# Altium PCB Copy of CCP_PCB2.PcbDoc
Units mil, origin at the board's own origin, x right, y up, seen from the top; angles counter-clockwise.
Board outline 4480 x 3340 mil, 2 copper layers (Top Layer, Bottom Layer); 67 components, 54 nets, 268 pads, 26 vias.
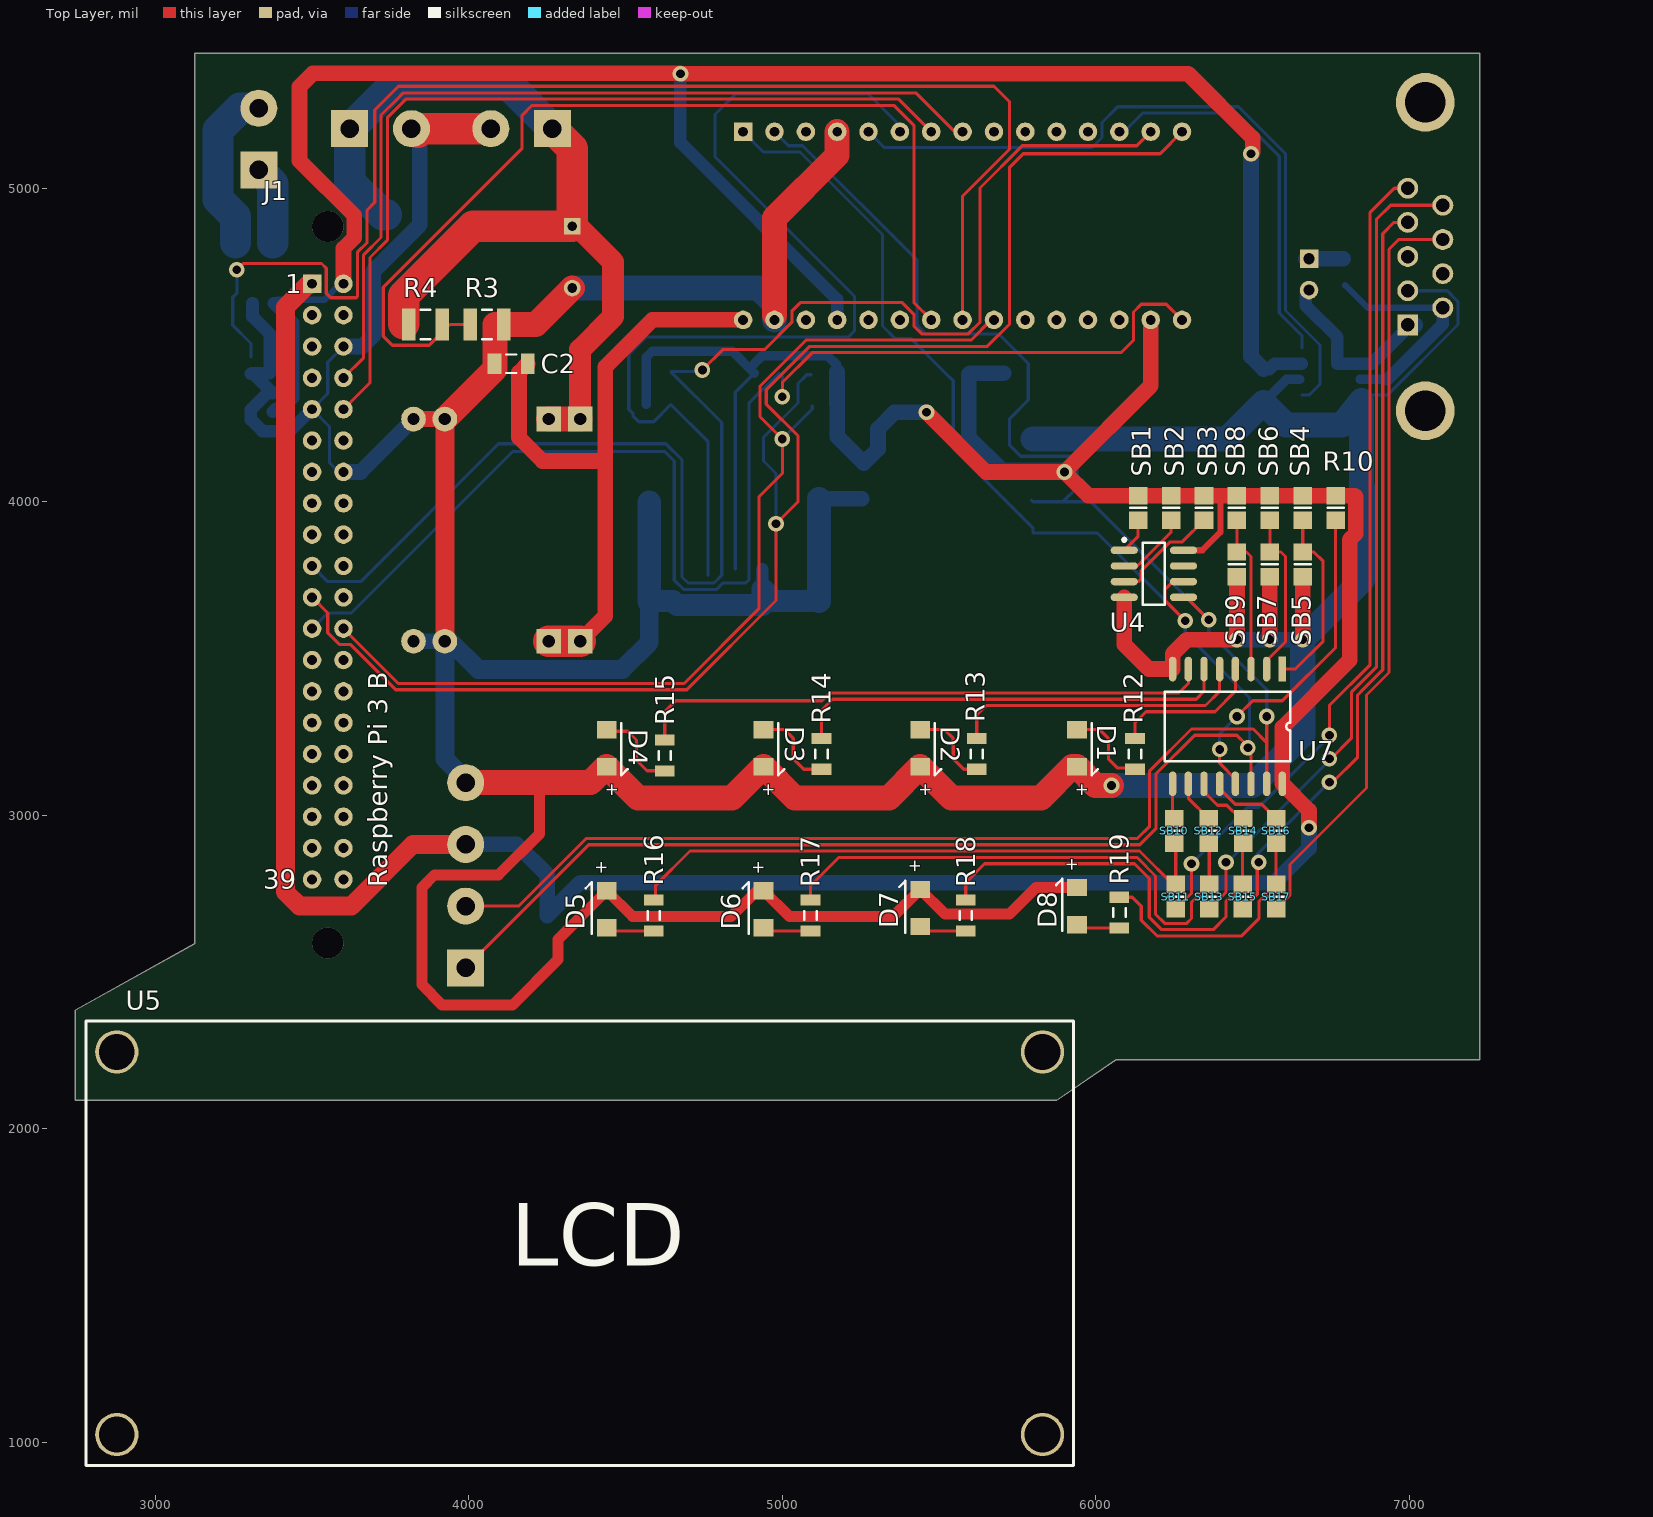
[diagram p0: Top Layer view]
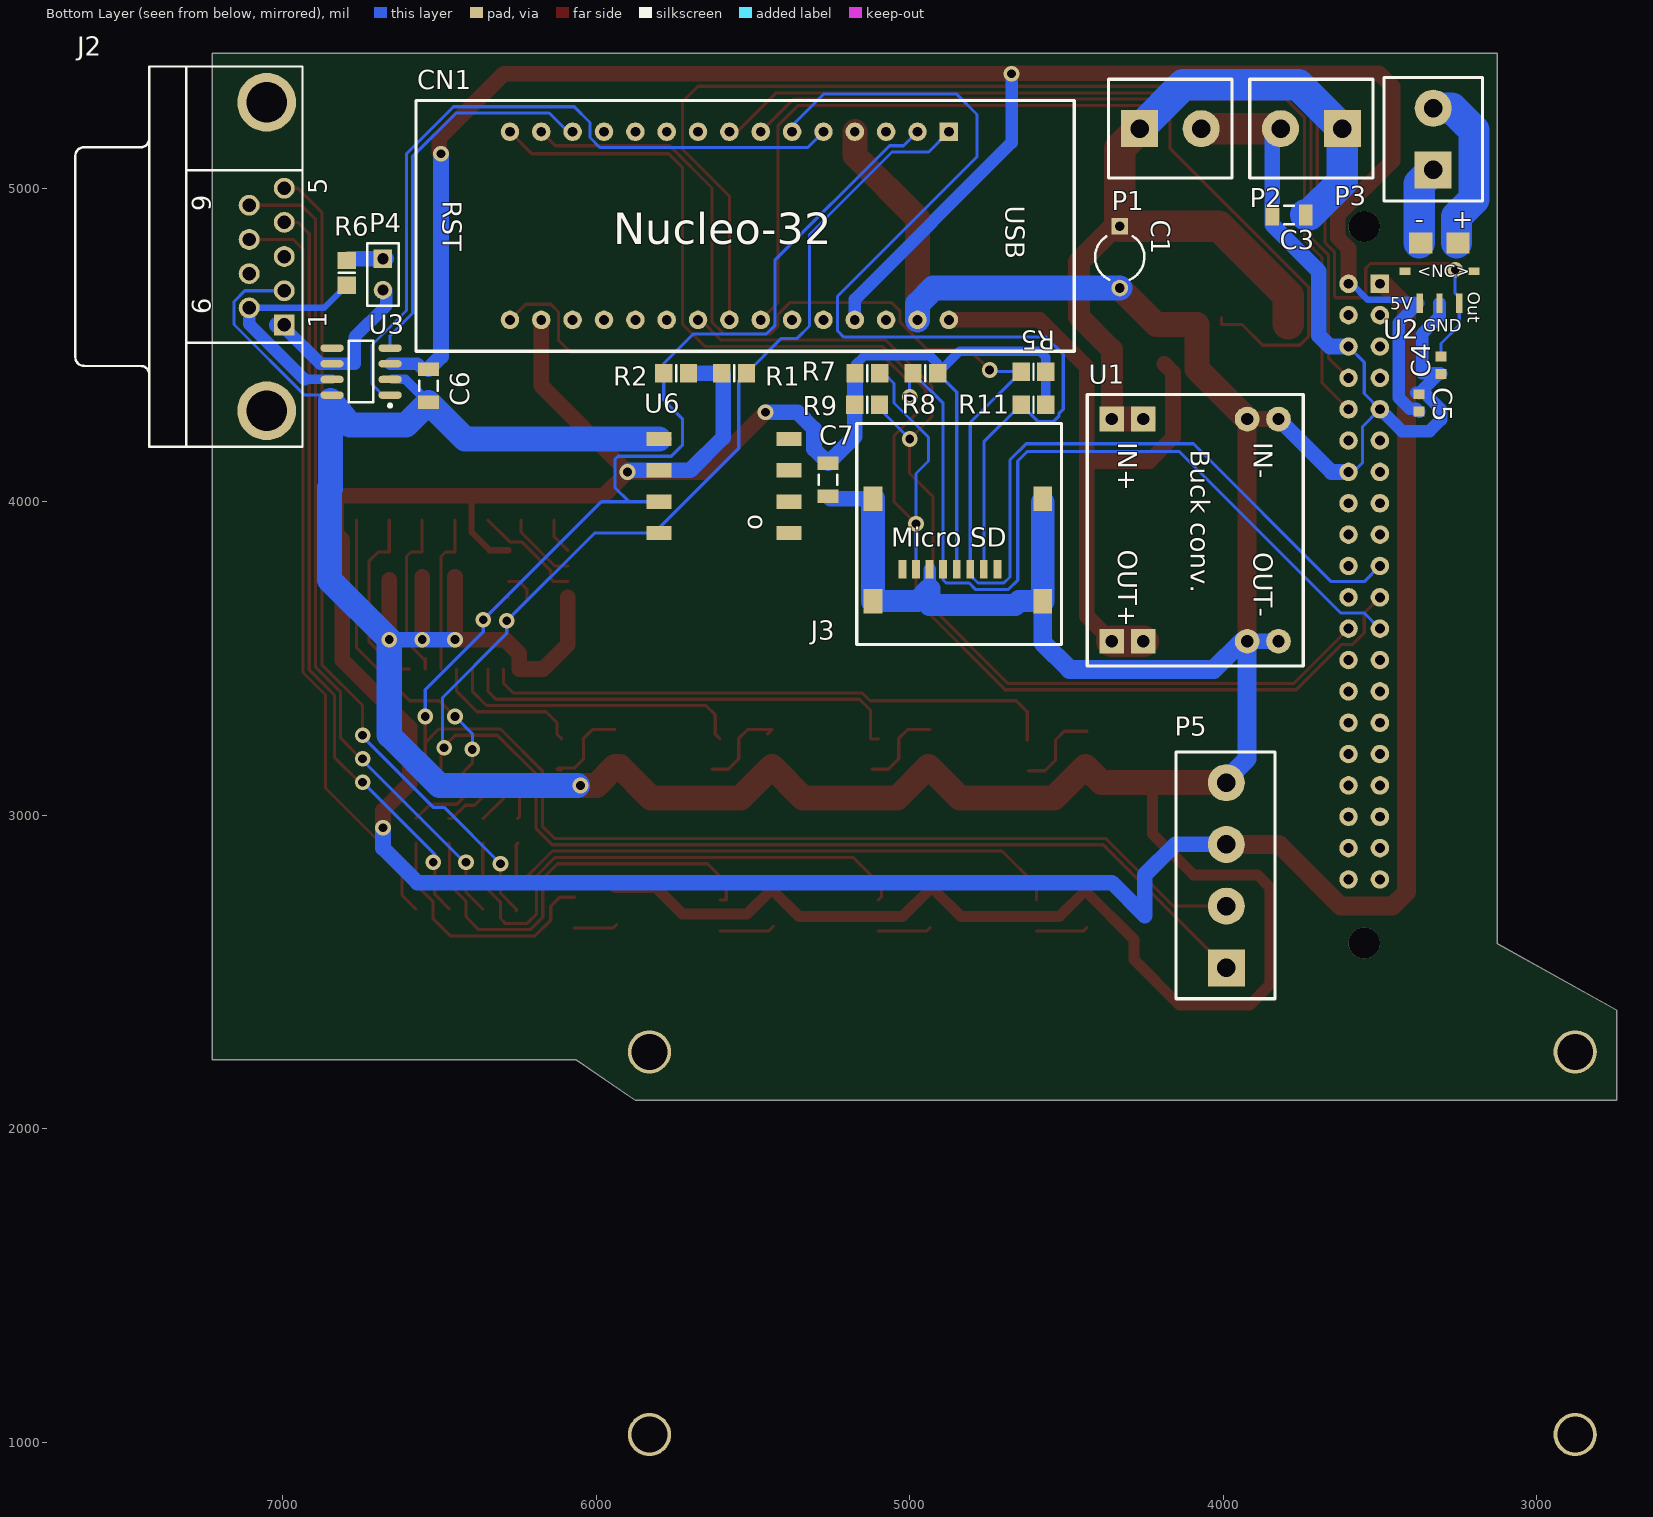
[diagram p1: Bottom Layer view, seen from below]

## Layer stack, top to bottom
Top Solder: solder mask 0.4, Solder Resist, Dk 3.5
Top Layer: signal copper 1.4
Dielectric 1: dielectric 12.6, FR-4, Dk 4.8
Bottom Layer: signal copper 1.4
Bottom Solder: solder mask 0.4, Solder Resist, Dk 3.5

## Board outline
5875,2090 6065,2220 7225,2220 7225,5430 3125,5430 3125,2590.06 2745,2378.47 2745,2090

## Design rules (kind name [scope] priority, off if disabled: settings)
Clearance [All] p1: gap=10 ignorepadtopadclearanceinfootprint=FALSE except(0: Arc-Hole Track-Hole SMDPad-Hole THPad-Hole Via-Hole Fill-Hole Poly-Hole Region-Hole Text-Hole)
PolygonConnect [All] p1: connectstyle=Relief reliefconductorwidth=10 reliefentries=4 polygonreliefangle="90 Angle" airgapwidth=10
RoutingVias [All] p1: holewidth=28 width=50 viastyle="Through Hole" minholewidth=28 minwidth=50 maxholewidth=28 maxwidth=50
SolderMaskExpansion [All] p1: expansion=4
Width [All] p1: maxlimit=200 minlimit=10 preferedwidth=10 minimp=50.000000 maximp=50.000000 favimp=50.000000
30 further rules are at their usual default settings.

## Classes and differential pairs
component class CCP_MCU: C1 C2 C3 C4 C5 C6 CN1 J1 J2 P1 P2 P3 P4 R1 R2 R3 R4 R5 R6 R7 R8 R9 SB1 SB2 SB3 U1 U2 U3 U4
component class CCP_IO: C7 D1 D2 D3 D4 D5 D6 D7 D8 J3 P5 R10 R11 R12 R13 R14 R15 R16 R17 R18 R19 SB4 SB5 SB6 SB7 SB8 SB9 SB10 SB11 SB12 SB13 SB14 SB15 SB16 SB17 U5 U6 U7

## Components (designator, comment, footprint, x,y, rotation, side; value= is the part's Value field where it differs from the comment)
C1 "Cap" CAPR5-4X5 4330,4780 r270 bottom value=220uF
C2 "Cap" C1206 4135,4440 r0 top value=10uF
C3 "Cap" C1206 3790,4915 r180 bottom value=10uF
C4 "Cap Semi" 1608[0603] 3305,4435 r90 bottom value=100pF
C5 "Cap Semi" 1608[0603] 3375,4315 r90 bottom value=.1uF
C6 "Cap" C1206 6535,4370 r90 bottom value=10uF
C7 "Cap" C1206 5260,4070 r90 bottom value=10uF
CN1 "NUCLEO-L432KC" NUCLEO-32 4875,5180 r270 bottom
D1 "LED1" "1206 LED" 5939.63,3213.9 r270 top
D2 "LED1" "1206 LED" 5439.63,3213.9 r270 top
D3 "LED1" "1206 LED" 4939.63,3213.9 r270 top
D4 "LED1" "1206 LED" 4439.63,3213.9 r270 top
D5 "LED1" "1206 LED" 4440,2700 r90 top
D6 "LED1" "1206 LED" 4940,2700 r90 top
D7 "LED1" "1206 LED" 5440,2704.06 r90 top
D8 "LED1" "1206 LED" 5940,2710 r90 top
J1 "Raspberry Pi" "Raspberry Pi - CCP Outline" 3160,2555 r0 top
J2 "D Connector 9" DSUB1.385-2H9 7424.92,4781.89 r90 bottom
J3 "uSD" MICRO_SD_HOLDER 5023.23,3785 r180 bottom
P1 "V_BATT" "2POS TERM BLOCK" 4266.85,5190 r180 bottom
P2 "NAP" "2POS TERM BLOCK" 3620,5190 r0 bottom
P3 "Header 2H" "2POS TERM BLOCK" 3330,5058.15 r90 bottom
P4 "TERM" HDR1X2 6680,4775 r270 bottom
P5 "Header 4" "4POS TERM BLOCK" 3990,2513.15 r90 bottom (schematic designator P?)
R1 "Res1" 6-0805_M 5560,4410 r0 bottom value=1K
R2 "Res1" 6-0805_M 5745,4410 r180 bottom value=1K
R3 "SMD 1210" 14-1210 4058.15,4565 r0 top value=1K
R4 "SMD 1210" 14-1210 3861.85,4565 r0 top value=4.5K
R5 "Res1" 6-0805_M 4605,4415 r0 bottom value=47K
R6 "Res1" 6-0805_M 6795,4730 r270 bottom value=120
R7 "Res1" 6-0805_M 5135,4410 r180 bottom value=47K
R8 "Res1" 6-0805_M 4950,4410 r0 bottom value=47K
R9 "Res1" 6-0805_M 5135.63,4310 r0 bottom value=47K
R10 "Res1" 6-0805_M 6765,3980 r90 top value=10K
R11 "Res1" 6-0805_M 4605,4310 r0 bottom value=10K
R12 "Res1" 1206 6125,3146.57 r90 top value=1K
R13 "Res1" 1206 5620,3146.57 r90 top value=1K
R14 "Res1" 1206 5125,3146.57 r90 top value=1K
R15 "Res1" 1206 4625,3141.57 r90 top value=1K
R16 "Res1" 1206 4590,2631.1 r90 top value=1K
R17 "Res1" 1206 5090,2631.1 r90 top value=1K
R18 "Res1" 1206 5585,2631.1 r90 top value=1K
R19 "Res1" 1206 6075,2640 r90 top value=1K
SB1 "Res1" 6-0805_M 6135,3980 r90 top value=0
SB2 "Res1" 6-0805_M 6240,3980 r90 top value=0
SB3 "Res1" 6-0805_M 6345,3980 r90 top value=0
SB4 "Res1" 6-0805_M 6660,3980 r90 top value=0
SB5 "Res1" 6-0805_M 6660,3800 r90 top value=0
SB6 "Res1" 6-0805_M 6555,3980 r90 top value=0
SB7 "Res1" 6-0805_M 6555,3800 r90 top value=0
SB8 "Res1" 6-0805_M 6450,3980 r90 top value=0
SB9 "Res1" 6-0805_M 6450,3800 r90 top value=0
SB10 "Res1" 6-0805_M 6250,2950 r90 top value=0
SB11 "Res1" 6-0805_M 6255,2740 r90 top value=0
SB12 "Res1" 6-0805_M 6360,2950 r90 top value=0
SB13 "Res1" 6-0805_M 6361.67,2740 r90 top value=0
SB14 "Res1" 6-0805_M 6470,2950 r90 top value=0
SB15 "Res1" 6-0805_M 6468.33,2740 r90 top value=0
SB16 "Res1" 6-0805_M 6575,2950 r90 top value=0
SB17 "Res1" 6-0805_M 6575,2740 r90 top value=0
U1 "MP1584EN Breakout Board" "MP1584EN Breakout" 3823.5,4263.66 r270 bottom
U2 "ACS780xLR" "7-pin PSOF" 3310,4735 r180 bottom
U3 "MCP2561" SO8_L 6750,4415 r0 bottom
U4 "CAT24C32" SO8_N 6185,3770 r0 top
U5 "16x2 Char. LCD" B01LC8HZ2O 2877.24,2245 r0 top
U6 "SSCMNNN030PA2A3" 8-SMT 5385,4200 r270 bottom
U7 "PCF8574" 16-SOIC 6595,3466.14 r270 top

## Footprints (in the part's own frame and the unit in brackets; to place one, negate y for a bottom-side part, rotate by r counter-clockwise, add the part's x,y. Pads: shape width x height; smd on the part's side, far side on the other; paste and mask are expansions set on the pad)
"2POS TERM BLOCK" [mm] "5mm Pitch"
  rect 3x3 hole 1.5: 1(0,0)
  round 3 hole 1.5: 2(5,0)
  silkscreen extent -2.5,-4 7.5,4, body extent -2.51,-4.57 8.09,4.43, height 12.6
"4POS TERM BLOCK" [mm]
  rect 3x3 hole 1.5: 1(0,0)
  round 3 hole 1.5: 2(5,0) 3(10,0) 4(15,0)
  silkscreen extent -2.5,-3.94 17.5,4.06, body extent -2.55,-4.56 18.05,4.44, height 3.8
6-0805_M [mm] "Chip Resistor, Body 2.0x1.2mm, IPC Low Density"
  rect 1.4x1.5 smd: 1(-1,0) 2(1,0)
  silkscreen extent 0,-0.65 0,0.65, body extent -1.07,-0.7 1.07,0.7, height 0.7
"7-pin PSOF" [mm] "ACS780xLR"
  rect 0.5x1.6 smd: 1(-1.6,-2.6) 2(0,-2.6) 3(1.6,-2.6)
  rect 0.9x0.6 smd: 4(2.8,0) 7(-2.8,0)
  rect 1.9x1.7 smd: 5(1.5,2.3) 6(-1.5,2.3)
8-SMT [mm]
  rect 1.15x2.04 smd: 1(0,-10.54) 2(2.54,-10.54) 3(5.08,-10.54) 4(7.62,-10.54) 5(7.62,0) 6(5.08,0) 7(2.54,0) 8(0,0)
  body extent -1.35,-12 8.55,1.46, height 5.44
14-1210 [mm] "Chip Resistor, Body 3.2x2.5mm, IPC High Density"
  rect 1.1x2.6 smd: 1(-1.35,0) 2(1.35,0)
  silkscreen extent -0.4,-1.2 0.4,1.2, body extent -1.68,-1.32 1.68,1.32, height 0.9
16-SOIC [mm]
  rect 2x0.6 smd: 1(0,0)
  oval 2x0.6 smd: 2(0,-1.27) 3(0,-2.54) 4(0,-3.81) 5(0,-5.08) 6(0,-6.35) 7(0,-7.62) 8(0,-8.89) 9(9.3,-8.89) 10(9.3,-7.62) 11(9.3,-6.35) 12(9.3,-5.08) 13(9.3,-3.81) 14(9.3,-2.54) 15(9.3,-1.27) 16(9.3,0)
  silkscreen extent 1.84,-9.53 7.46,0.64
1206 [mm] "1206 SMD Resistor"
  rect 0.9x1.6 smd: 1(0,0) 2(2.5,0)
  silkscreen extent 0.9,-0.5 1.6,0.5
"1206 LED" [mm]
  rect 1.4x1.6 smd: 1(-1.5,0) 2(1.5,0)
  silkscreen extent -2,1.2 2.2,1.7, body extent -1.4,-0.8 1.5,0.8, height 1
1608[0603] [mm] "Chip Capacitor, Body 1.6x0.8mm, IPC High Density"
  rect 0.8x0.9 smd: 1(-0.7,0) 2(0.7,0)
  body extent -0.87,-0.48 0.87,0.48, height 1.3
B01LC8HZ2O [mm] "LCD 16x2 Characters"
  round 3.5 hole 2.9: H(0,-31) H(0,0) H(75,-31) H(75,0)
  silkscreen extent -2.5,-33.5 77.5,2.5
C1206 [mm] "Chip Capacitor, Body 3.2x1.6mm, IPC High Density"
  rect 1.1x1.7 smd: 1(-1.35,0) 2(1.35,0)
  silkscreen extent -0.4,-0.75 0.4,0.75, body extent -1.7,-0.9 1.7,0.9, height 1.3
CAPR5-4X5 [mm] "Capacitor; 2 Leads"
  rect 1.35x1.35 hole 0.8: 1(-2.5,0)
  round 1.35 hole 0.8: 2(2.5,0)
  silkscreen extent -1.69,-2 1.82,2
DSUB1.385-2H9 [mm] "Connector; D Subminiature; 9 Position; Right Angle; Pitch 1.385 mm"
  rect 1.69x1.69 hole 1.09: 1(-5.54,-10.92)
  round 1.69 hole 1.09: 2(-2.77,-10.92) 3(0,-10.92) 4(2.77,-10.92) 5(5.54,-10.92) 6(-4.155,-8.08) 7(-1.385,-8.08) 8(1.385,-8.08) 9(4.155,-8.08)
  round 4.76 hole 3.26: 10(-12.495,-9.5) 11(12.495,-9.5)
  silkscreen extent -15.4,-12.4 15.4,6
HDR1X2 [mm] "Connector; Header; 2 Position"
  rect 1.5x1.5 hole 0.9: 1(0,0)
  round 1.5 hole 0.9: 2(2.54,0)
  silkscreen extent -1.27,-1.27 3.81,1.27
MICRO_SD_HOLDER [mm]
  rect 0.63x1.5 smd: 1(7.7,0) 2(6.6,0) 3(5.5,0) 4(4.4,0) 5(3.3,0) 6(2.2,0) 7(1.1,0) 8(0,0)
  rect 1.5x2 smd: 9(-2.38,-2.6) 9(-2.38,5.7) 9(11.37,-2.6) 9(11.37,5.7)
  silkscreen extent -3.7,-6.1 12.9,11.8
"MP1584EN Breakout" [mm] "Buck Converter"
  round 2 hole 1: 0(0,-2.54) 0(0,0) 2(18,-2.54) 2(18,0)
  rect 2x2 hole 1: 1(0,-13.5) 1(0,-10.96) 3(18,-13.5) 3(18,-10.96)
  silkscreen extent -2,-15.5 20,2
NUCLEO-32 [mm]
  rect 1.5x1.5 hole 0.8: 1(0,0)
  round 1.5 hole 0.8: 2(0,-2.54) 3(0,-5.08) 4(0,-7.62) 5(0,-10.16) 6(0,-12.7) 7(0,-15.24) 8(0,-17.78) 9(0,-20.32) 10(0,-22.86) 11(0,-25.4) 12(0,-27.94) 13(0,-30.48) 14(0,-33.02) 15(0,-35.56) 16(15.24,-35.56) 17(15.24,-33.02) 18(15.24,-30.48) 19(15.24,-27.94) 20(15.24,-25.4) 21(15.24,-22.86) 22(15.24,-20.32) 23(15.24,-17.78) 24(15.24,-15.24) 25(15.24,-12.7) 26(15.24,-10.16) 27(15.24,-7.62) 28(15.24,-5.08) 29(15.24,-2.54) 30(15.24,0)
  silkscreen extent -2.54,-43.18 17.78,10.16, body extent -1.67,-40.6 16.87,9.69, height 5
"Raspberry Pi - CCP Outline" [mm]
  rect 1.5x1.5 hole 0.8: 1(8.636,54.356)
  round 1.5 hole 0.8: 2(11.176,54.356) 3(8.636,51.816) 4(11.176,51.816) 5(8.636,49.276) 6(11.176,49.276) 7(8.636,46.736) 8(11.176,46.736) 9(8.636,44.196) 10(11.176,44.196) 11(8.636,41.656) 12(11.176,41.656) 13(8.636,39.116) 14(11.176,39.116) 15(8.636,36.576) 16(11.176,36.576) 17(8.636,34.036) 18(11.176,34.036) 19(8.636,31.496) 20(11.176,31.496) 21(8.636,28.956) 22(11.176,28.956) 23(8.636,26.416) 24(11.176,26.416) 25(8.636,23.876) 26(11.176,23.876) 27(8.636,21.336) 28(11.176,21.336) 29(8.636,18.796) 30(11.176,18.796) 31(8.636,16.256) 32(11.176,16.256) 33(8.636,13.716) 34(11.176,13.716) 35(8.636,11.176) 36(11.176,11.176) 37(8.636,8.636) 38(11.176,8.636) 39(8.636,6.096) 40(11.176,6.096)
  round 2.54 hole 2.54 unplated: H(9.906,0.946) H(9.906,58.996)
SO8_L [mm] "SOIC, 8-Leads, Body 4.9x3.9mm, Pitch 1.27mm, IPC High Density"
  oval 1.9x0.6 smd: 1(-2.35,1.905) 2(-2.35,0.635) 3(-2.35,-0.635) 4(-2.35,-1.905) 5(2.35,-1.905) 6(2.35,-0.635) 7(2.35,0.635) 8(2.35,1.905)
  silkscreen extent -2.47,-2.5 1,2.88, body extent -2,-2.5 2,2.5, height 1.75
SO8_N [mm] "SOIC, 8-Leads, Body 4.9x3.9mm, Pitch 1.27mm, IPC Medium Density"
  oval 2.2x0.6 smd: 1(-2.4,1.905) 2(-2.4,0.635) 3(-2.4,-0.635) 4(-2.4,-1.905) 5(2.4,-1.905) 6(2.4,-0.635) 7(2.4,0.635) 8(2.4,1.905)
  silkscreen extent -2.52,-2.5 0.9,2.88, body extent -2,-2.5 2,2.5, height 1.75

## Part data
C1 C2 C3 C6 C7: "Capacitor", LatestRevisionDate=17-Jul-2002, LatestRevisionNote="Re-released for DXP Platform.", PackageDescription="Radial Cap, Thru-Hole; 2 Leads; 0.3 in Pin Spacing", PackageReference=RAD-0.3, Published=8-Jun-2000, Publisher="Altium Limited"
C4 C5: "Capacitor (Semiconductor SIM Model)", LatestRevisionDate=29-May-2009, LatestRevisionNote="IPC-7351 Footprint Added.", PackageDescription="Chip Capacitor", PackageReference=C1206, Published=8-Jun-2000, Publisher="Altium Limited"
CN1: "STM32L432KC Development Board", ComponentLink1Description=MBED, ComponentLink1URL=https://os.mbed.com/platforms/ST-Nucleo-L432KC/, ComponentLink2Description=Digikey, ComponentLink2URL=https://www.digikey.com/products/en?keywords=NUCLEO-L432KC
D1 D2 D3 D4 D5 D6 D7 D8: "Typical RED GaAs LED", LatestRevisionDate=08-Jul-2005, LatestRevisionNote="Mech Layer 1 removed.", PackageDescription="LED; 2 Leads", PackageReference=LED-1, Published=8-Jun-2000, Publisher="Altium Limited"
J1: "2x20 Header"
J2: "Receptacle Assembly, 9 Position, Right Angle", PackageDocument=O, DatasheetDocument=1-Sep-1999, Gender=Receptacle, LatestRevisionDate=17-Jul-2002, LatestRevisionNote="Re-released for DXP Platform.", Orientation="Right Angle", PackageReference=788750, Positions=9, Published=15-Jun-2001, Publisher="Altium Limited"
J3: library part "SD Card"
P1 P2 P4: library part "Header 2", "Header, 2-Pin", LatestRevisionDate=17-Jul-2002, LatestRevisionNote="Re-released for DXP Platform.", Publisher="Altium Limited"
P3: "Header, 2-Pin, Right Angle", LatestRevisionDate=17-Jul-2002, LatestRevisionNote="Re-released for DXP Platform.", Publisher="Altium Limited"
P5: "Header, 4-Pin", LatestRevisionDate=17-Jul-2002, LatestRevisionNote="Re-released for DXP Platform.", Publisher="Altium Limited"
R1 R2 R5 R6 R7 R8 R9 R10 R11 R12 R13 R14 R15 R16 R17 R18 R19 SB1 SB2 SB3 SB4 SB5 SB6 SB7 SB8 SB9 SB10 SB11 SB12 SB13 SB14 SB15 SB16 SB17: "Resistor", LatestRevisionDate=17-Jul-2002, LatestRevisionNote="Re-released for DXP Platform.", PackageDescription="Axial Device, Thru-Hole; 2 Leads; 0.3 in Pin Spacing", PackageReference=AXIAL-0.3, Published=8-Jun-2000, Publisher="Altium Limited"
R3 R4: library part Res1, "Resistor", LatestRevisionDate=17-Jul-2002, LatestRevisionNote="Re-released for DXP Platform.", PackageDescription="Axial Device, Thru-Hole; 2 Leads; 0.3 in Pin Spacing", PackageReference=AXIAL-0.3, Published=8-Jun-2000, Publisher="Altium Limited"
U1: "Buck Converter", ComponentLink1Description=Part, ComponentLink1URL=https://www.amazon.com/eBoot-MP1584EN-Converter-Adjustable-Module/dp/B01MQGMOKI/
U2: "Hall-Effect Current Sensor", ComponentLink1Description=Part, ComponentLink1URL=https://www.digikey.com/product-detail/en/allegro-microsystems-llc/ACS780LLRTR-050B-T/620-1817-1-ND/6189106
U3: "CAN Transciever", ComponentLink1Description=Part, ComponentLink1URL=https://www.digikey.com/product-detail/en/microchip-technology/MCP2561-E-SN/MCP2561-E-SN-ND/4079961, ComponentLink2Description=Datasheet, ComponentLink2URL=http://ww1.microchip.com/downloads/en/DeviceDoc/20005167C.pdf
U4: "I2C EEPROM", ComponentLink1Description=Part, ComponentLink1URL=https://www.digikey.com/product-detail/en/on-semiconductor/CAT24C32WI-GT3/CAT24C32WI-GT3CT-ND/1631159, ComponentLink2Description=Datasheet, ComponentLink2URL=http://www.onsemi.com/pub/Collateral/CAT24C32-D.PDF
U5: library part B01LC8HZ2O, "LCD 16x2 Character", ComponentLink1Description=Part, ComponentLink1URL=https://www.amazon.in/Industry-Interface-Display-Character-MEGA2560/dp/B01LC8HZ2O
U6: "Honeywell Digital Pressure Sensor", ComponentLink1Description=Part, ComponentLink1URL=https://www.digikey.com/product-detail/en/honeywell-sensing-and-productivity-solutions/SSCMNNN030PA2A3/480-6407-ND/2416123, ComponentLink2Description=Datasheet, ComponentLink2URL=https://sensing.honeywell.com/index.php?ci_id=151134
U7: "I2C I/O Expander", ComponentLink1Description=Part, ComponentLink1URL=https://www.digikey.com/product-detail/en/texas-instruments/PCF8574DWR/296-13108-1-ND/484579, ComponentLink2Description=Datasheet, ComponentLink2URL=http://www.ti.com/lit/ds/symlink/pcf8574.pdf

## Via types
v1: diameter 50, hole 28, Top Layer to Bottom Layer, 26 vias

## Nets (pads, with @x,y where several pads share a name; then routed paths per layer and width w, separated by ;. In a path a pad name is that pad's centre, name@x,y a point inside that pad or via, vN(x,y) a via of type N, cw(c..) or ccw(c..) an arc to the next point about the centre after c; other vN are vias at no path point)
CAN1_H: J2.6 R6.2 U3.7 | length 730.9
  Bottom Layer w20: R6.2 6867.32,4618.31 J2.6
  Bottom Layer w30: U3.7 6930.18,4390
  Bottom Layer w40: 6930.18,4390 7106.81,4566.63 J2.6
CAN1_L: J2.1 P4.2 U3.6 | length 581.1
  Bottom Layer w40: P4.2@6670,4675 6670,4625 6770.12,4524.88 6770.12,4440 U3.6 6879.29,4440 6995,4555.71 J2.1
  Bottom Layer w50: J2.1 J2.1@7018.78,4563.78
CAN1_RX: CN1.13 U3.4 | length 1233.9
  Bottom Layer w10: CN1.13 6090,5180 6150,5240 6446.72,5240 6585,5101.72 6585,4601.72 6657.48,4529.24 U3.4
CAN1_TX: CN1.5 U3.1 | length 2347.4
  Bottom Layer w10: CN1.5 5325,5130 5987.97,5130 6019.53,5161.56 6019.53,5209.53 6070,5260 6455,5260 6605,5110 6605,4610 6715,4500 6715,4375 6680,4340 U3.1
CURR_SENSE: C4.2 CN1.23 U2.3 | length 4245.5
  Top Layer w10: v1(3260,4740) 3280,4760 3530,4760 3545,4745 3545,4665 3559.53,4650.47 3640.47,4650.47 3644.53,4654.53 3644.53,4795.43 3675,4825.9 3675,4930 3700,4955 3700,5249.32 3775.68,5325 4584.85,5325 5675,5325 5725,5275 5725,5125 5575,4975 CN1.23
  Bottom Layer w10: v1(3260,4740) 3260,4665 3247.01,4652.01 U2.3 3247.01,4562.78 3305,4504.79 C4.2
GND: C1.2 C2.1 C3.1 C4.1 C5.2 C6.1 C7.1 CN1.4 CN1.29 D1.2 D2.2 D3.2 D4.2 D5.2 D6.2 D7.2 D8.2 J1.6 J1.9 J1.14 J2.2 J3.6 J3.9 P1.2 P2.2 P5.4 R3.2 SB5.1 SB7.1 SB9.1 U1.0 U1.2 U2.2 U3.2 U3.8 U4.4 U6.1 U7.8 | length 19424.7
  Top Layer w10: D6.2@4919.06,2759.06 D6.2 ; D1.2@5924.84,3154.84 D1.2
  Top Layer w35: 4225,3103.7 4225,2940 4095,2810 3890,2810 3850,2770 3850,2460 3915,2395 4140,2395 4285,2540 4285,2604.06 D5.2 4522.74,2676.32 4836.32,2676.32 D6.2@4919.06,2759.06 ; D6.2 5022.74,2676.32 5353.21,2676.32 D7.2 5518.8,2684.31 5724.31,2684.31 5809.06,2769.06 D8.2
  Top Layer w50: U1.0@3823.5,4263.66 U1.0@3923.5,4263.66 ; U4.4 6090.51,3544.49 6168.86,3466.14 U7.8 6245,3515 6290,3560 v1(6450,3560) SB9.1 ; v1(6555,3560) SB7.1 ; v1@6660,3565 SB5.1@6660,3750.63
  Top Layer w60: U1.2@3923.5,3555 U1.0@3923.5,4263.66
  Top Layer w80: U1.0@3923.5,4263.66 4083.15,4423.31 4083.15,4565 4213.43,4565 C1.2 ; P5.4 4225,3103.7 4388.49,3103.7 D4.2 4539.47,3055 4839.79,3055 D3.2 5039.47,3055 5339.79,3055 D2.2 5539.47,3055 5825,3055 D1.2@5924.84,3154.84 ; CN1.29@4975,4594.81 4975,4905 5175,5105 CN1.4 ; D1.2 5999.47,3095 v1(6050,3095)
  Top Layer w100: P2.2 P2.2@3825,5190 ; P2.2@3836.85,5178.15 P2.2@3825,5190 ; P1.2 P2.2@3825,5190
  Bottom Layer w10: J1.14 3585,4095 3555,4125 3555,4240 J1.9 3550,4345 3550,4445 J1.6 ; 4936.61,3721.61 4936.61,3722.74 ; C7.1@5252.56,4009.41 C7.1 ; U3.8 6847.52,4322.52 6847.52,4337.52 6850,4340 6929.68,4340 7155.08,4565.4 7155.08,4638.3 7120.54,4672.83 J2.2 ; 6847.52,4042.52 6850,4045
  Bottom Layer w30: C6.1 6608.15,4390 U3.2@6650,4390
  Bottom Layer w40: C4.1 3307.56,4410 3365,4410 3365,4535 3310,4590 U2.2 ; C4.1@3313.75,4407.44 C5.2@3374.38,4346.81 ; C5.2@3375,4346.19 C5.2@3374.38,4346.81 ; C5.2@3384.37,4346.81 C5.2@3374.38,4346.81 ; J1.9 3430,4225 3341.55,4225 3305,4261.55 3305,4293.33 3358.48,4346.81 C5.2@3374.38,4346.81 ; 4936.61,3722.74 J3.6
  Bottom Layer w50: J1.14 3654.84,4095 U1.0@3823.5,4263.66 ; J1.6 3660,4495 3695,4530 3695,4735 3843.15,4883.15 C3.1 3843.15,5163.7 P2.2 ; U1.2@3823.5,3555 U1.2@3923.5,3555 ; J3.9@5116.93,4009.41 C7.1@5252.56,4009.41 ; v1(6450,3560) v1(6555,3560) v1(6660,3560)
  Bottom Layer w60: P5.4 3995,3108.7 3923.5,3180.2 3923.5,3555 3940,3555 4030,3465 4490,3465 4575.59,3550.59 J3.9@4575.59,3682.64
  Bottom Layer w70: J3.9@4575.59,3682.64 4576.18,3682.64 4651.65,3682.64 4663.82,3670.47 4936.61,3670.47 4936.61,3721.61 4975.59,3682.64 J3.9@5116.93,3682.64
  Bottom Layer w75: J3.9@4576.18,3682.64 J3.9@4576.18,3998.82 ; J3.9@5116.93,3682.64 J3.9@5116.93,4009.41
  Bottom Layer w80: C1.2 4923.43,4681.57 4975,4630 CN1.29 ; U6.1 6418.15,4200 C6.1 6606.85,4245 6785,4245 6842.54,4316.34 6847.52,4322.52 6847.52,4042.52 ; v1@6060,3095 6500,3095 6660,3255 v1(6660,3560) 6850,3750 6850,4045
I2C1_SCL: CN1.1 P5.1 R1.1 U4.6 U6.4 U7.14 | length 6080.1
  Top Layer w10: P5.1 4382.48,2905.63 6140.63,2905.63 6191.5,2956.5 6191.5,3131.5 6315,3255 6450,3255 v1@6479.14,3225.86 ; U4.6 6245,3745 6221.18,3721.18 6221.18,3683.82 v1(6285,3620) ; v1(6485,3215) 6495,3205 U7.14
  Bottom Layer w10: CN1.1 4939.53,5115.47 5056.24,5115.47 5319.53,4852.19 5319.53,4560.47 5360,4520 5410.63,4520 R1.1 5545,4385.63 5545,4170 5799.96,3915.04 U6.4 6005,3900 v1(6285,3620) 6285,3580 6490,3375 6490,3220 v1(6485,3215)
I2C1_SDA: CN1.2 P5.2 R2.1 U4.5 U6.3 U7.15 | length 6253.8
  Top Layer w10: P5.2 4158.57,2710 4374.2,2925.63 6132.35,2925.63 6171.5,2964.78 6171.5,3141.5 6305,3275 6501.57,3275 6545,3231.57 ; U4.5 6288.28,3695 v1(6360,3623.28) ; U7.15 6545,3231.57 ; v1(6545,3315) 6545,3231.57
  Bottom Layer w10: CN1.2 5019.53,5135.47 5064.53,5135.47 5430,4770 5430,4565 5430.47,4564.53 5430.47,4561.56 5456.56,4535.47 5689.53,4535.47 5784.37,4440.63 R2.1 5784.37,4324.37 5725,4265 5725,4180 5760,4145 5930,4145 5940,4135 5940,4045 5895,4000 ; U6.3@5794.96,4005 U6.3 5895,4000 ; v1(6545,3315) 6545,3400 6360,3585 v1(6360,3623.28) 5983.28,4000 5895,4000
IO_A0: SB4.1 SB5.2 U7.1 | length 600.2
  Top Layer w10: U7.1 6636.14,3466.14 6725,3555 6725,3810 6695.63,3839.37 SB5.2 SB4.1
IO_A1: SB6.1 SB7.2 U7.2 | length 547.5
  Top Layer w10: U7.2 U7.2@6545,3493.43 ; U7.2@6545,3500 U7.2@6545,3493.43 ; SB6.1 SB7.2 6590.63,3839.37 6605,3825 6605,3553.43 U7.2@6545,3493.43
IO_A2: SB8.1 SB9.2 U7.3 | length 511.1
  Top Layer w10: SB8.1 SB9.2 6480.63,3839.37 6495,3825 U7.3
LED0: R12.2 U7.4 | length 490.4
  Top Layer w10: R12.2@6110,3243.43 6125,3258.43 6125,3295 6160,3330 6380,3330 6445,3395 U7.4
LED1: R13.2 U7.5 | length 960
  Top Layer w10: R13.2@5605,3243.43 5620,3258.43 5620,3320 5650,3350 6350,3350 6395,3395 U7.5
LED2: R14.2 U7.6 | length 1431.6
  Top Layer w10: R14.2@5100,3243.43 5123.43,3243.43 R14.2 5125,3335 5160,3370 6320,3370 6345,3395 U7.6
LED3: R15.2 U7.7 | length 1843.4
  Top Layer w10: R15.2 4625,3330 4660,3365 5126.72,3365 5151.72,3390 6265,3390 6295,3420 U7.7
LED4_I2C: SB10.2 U7.9 | length 112.7
  Top Layer w10: U7.9 6245,2994.37 SB10.2
LED4_IN: J2.5 SB11.1 | length 2645
  Top Layer w10: SB11.1@6255,2695 6255,2700.55 6305,2750.55 v1(6305,2845) ; v1(6745,3255) 6745,3350 6875,3480 6875,4922.83 6952.17,5000 J2.5
  Bottom Layer w10: v1(6305,2845) 6485,3025 6520,3025 v1@6740,3245
LED5_I2C: SB12.2 U7.10 | length 137.6
  Top Layer w10: U7.10 6295,3054.37 SB12.2
LED5_IN: J2.9 SB13.1 | length 2660.9
  Top Layer w10: SB13.1 6415,2753.96 v1(6415,2850) ; v1@6750,3180 6815,3245 6815,3391.72 6895,3471.72 6895,4900 6940.47,4945.47 J2.9
  Bottom Layer w10: v1(6415,2850) 6415,2845 v1@6750,3180
  other v1: 6745,3180
LED6_I2C: SB14.2 U7.11 | length 185.5
  Top Layer w10: U7.11 6345,3075 6388.07,3031.93 6418.07,3031.93 6460.63,2989.37 SB14.2
LED6_IN: J2.4 SB15.1 | length 2444.3
  Top Layer w10: SB15.1 6515,2747.3 6515,2845 v1(6520,2850) ; v1@6755,3105 6835,3185 6835,3383.43 6855,3403.43 6915,3463.43 6915,4855 6950.94,4890.94 J2.4
  Bottom Layer w10: v1(6520,2850) 6520,2870 6515,2875 v1(6745,3105) v1@6755,3105
LED7_I2C: SB16.2 U7.12 | length 234.9
  Top Layer w10: U7.12 6395,3084.52 6444.52,3035 6529.37,3035 SB16.2
LED7_IN: J2.8 SB17.1 | length 2438.3
  Top Layer w10: SB17.1 6619.53,2745.16 6619.53,2842.96 6863.28,3086.72 6863.28,3383.43 6935,3455.15 6935,4805 6966.42,4836.42 J2.8
LV_BATT+: C1.1 C3.2 P1.1 P2.1 R4.1 U1.1 | length 2974.5
  Top Layer w10: R4.1@3791.85,4565 R4.1@3791.85,4566.85
  Top Layer w70: C1.1 4346.57,4878.43 4460,4765 4460,4590 4355,4485 U1.1@4355,4263.66
  Top Layer w80: U1.1@4255,4263.66 U1.1@4355,4263.66
  Top Layer w100: R4.1@3791.85,4566.85 3791.85,4656.85 4013.43,4878.43 C1.1 4330,5126.85 P1.1
  Bottom Layer w100: C3.2 3725,4915 3620,5020 P2.1 3760,5330 4126.85,5330 P1.1
NetD1_1: D1.1 R12.1 | length 285.8
  Top Layer w10: D1.1 6012.05,3272.95 6040,3245 6040,3180 6070,3150 6121.57,3150 R12.1 ; R12.1@6110,3145 R12.1@6120,3145
NetD2_1: D2.1 R13.1 | length 294.1
  Top Layer w10: D2.1 D2.1@5452.58,3260 ; D2.1@5444.63,3272.95 5517.05,3272.95 5545,3245 5545,3180 5578.43,3146.57 R13.1@5630,3146.57
NetD3_1: D3.1 R14.1 | length 275.8
  Top Layer w10: D3.1@4934.63,3272.95 5007.05,3272.95 5035,3245 5035,3180 5068.43,3146.57 R14.1@5120,3146.57
NetD4_1: D4.1 R15.1 | length 275.8
  Top Layer w10: D4.1@4434.63,3267.95 4507.05,3267.95 4535,3240 4535,3175 4568.43,3141.57 R15.1@4620,3141.57
NetD5_1: D5.1 R16.1 | length 164.1
  Top Layer w10: D5.1@4435,2640.94 4444.84,2631.1 4585,2631.1 R16.1@4595,2631.1
NetD6_1: D6.1 R17.1 | length 169.1
  Top Layer w10: D6.1@4935,2640.94 4944.84,2631.1 5085,2631.1 R17.1@5100,2631.1
NetD7_1: D7.1 R18.1 | length 175.8
  Top Layer w10: D7.1@5435,2645 5448.9,2631.1 5580,2631.1 R18.1@5605,2631.1
NetD8_1: D8.1 R19.1 | length 139.5
  Top Layer w10: D8.1@5935,2650.94 5945.94,2640 R19.1@6070,2640
NetP4_1: P4.1 R6.1 | length 127.3
  Bottom Layer w10: R6.1@6789.37,4775 R6.1
  Bottom Layer w50: P4.1@6670,4775 R6.1@6789.37,4775
NetR10_1: R10.1 U7.13 | length 1080.2
  Top Layer w10: v1(6395,3210) 6395,3165.48 6445,3115.48 U7.13 ; v1(6450,3315) 6500,3365 6595,3365 6765,3535 R10.1
  Bottom Layer w10: v1(6395,3210) 6395,3260 v1(6450,3315) v1@6450,3305
NetR16_2: R16.2 SB10.1 SB11.2 | length 1925.5
  Top Layer w10: R16.2@4595,2729.53 4595,2775 4705.63,2885.63 6139.37,2885.63 SB11.2@6250,2775 ; SB10.1 6255,2905.63 SB11.2
NetR17_2: R17.2 SB12.1 SB13.2 | length 1731.2
  Top Layer w10: R17.2@5100,2729.53 5090,2739.53 5090,2775 5180,2865 6131.72,2865 6190.47,2806.24 6190.47,2684.53 6220,2655 6290,2655 6305.28,2670.28 6305.28,2722.54 6361.67,2778.93 SB13.2 6361.67,2908.96 SB12.1
NetR18_2: R18.2 SB14.1 SB15.2 | length 1364.2
  Top Layer w10: R18.2@5605,2729.53 R18.2 5585,2785 5645,2845 6123.43,2845 6170.47,2797.96 6170.47,2674.53 6210,2635 6374.34,2635 6415,2675.66 6415,2725.68 6468.33,2779.01 SB15.2 6468.33,2908.96 SB14.1
NetR19_2: R19.2 SB16.1 SB17.2 | length 813.7
  Top Layer w10: R19.2@6070,2738.43 R19.2 6116.57,2738.43 6145,2710 6145,2665 6195,2615 6465,2615 6520,2670 6520,2724.01 6575,2779.01 SB17.2 SB16.1
NetSB1_1: SB1.1 U4.1 | length 114.1
  Top Layer w10: U4.1 6135,3889.49 SB1.1
NetSB2_1: SB2.1 U4.2 | length 231.7
  Top Layer w10: U4.2 6131.79,3795 6240,3903.21 SB2.1
NetSB3_1: SB3.1 U4.3 | length 350.1
  Top Layer w10: U4.3 6135,3745 6145,3755 6145,3779.92 6236.89,3871.81 6276.18,3871.81 SB3.1
POS3V3: C7.2 CN1.17 J1.1 J3.4 P5.3 R1.2 R2.2 R5.1 R7.1 R8.1 R9.2 R10.2 R11.1 SB1.2 SB2.2 SB3.2 SB4.2 SB6.2 SB8.2 U4.8 U6.2 U7.16 | length 12012.8
  Top Layer w20: U4.8 6340,3845 6397.5,3902.5 6397.5,4019.37
  Top Layer w50: v1(5460,4285) 5650,4095 v1(5900,4095) ; CN1.17 6175,4370 v1(5900,4095) ; v1(6680,2960) 6680,3015 U7.16 6595,3280.15 6810,3495.15 6810,3879.05 6829.53,3898.57 6829.53,4016.05 6826.21,4019.37 R10.2 SB4.2 SB6.2 SB8.2 6397.5,4019.37 SB3.2 SB2.2 SB1.2 5975.63,4019.37 v1(5900,4095)
  Top Layer w60: J1.1@3500,4694.53 3489.53,4694.53 3415,4620 3415,2755 3460,2710 3625,2710 3821.85,2906.85 P5.3
  Bottom Layer w10: J3.4 4850,4349.37 R8.1 4910.63,4440.63 ; R9.2@5174.37,4310.63 R9.2
  Bottom Layer w30: R11.1 R5.1 4565.63,4460.63 4585,4480 4840.63,4480 R8.1 ; 4910.63,4440.63 4935,4465 5145,4465 5174.37,4435.63 R7.1@5174.37,4415
  Bottom Layer w50: P5.3 4153.15,2906.85 4250,2810 4250,2680 4355,2785 6570,2785 6680,2895 v1(6680,2960) ; R9.2@5174.37,4310.63 R7.1 R7.1@5174.37,4415 ; R9.2 5175,4208.15 C7.2 5305,4168.15 5305,4232.29 5357.71,4285 v1(5460,4285) ; R2.2 R1.2 5595,4405.63 5595,4205 5700,4100 U6.2 5895,4100 v1(5900,4095)
POS5V: C5.1 C6.2 CN1.27 J1.2 U2.1 U3.3 | length 6393.9
  Top Layer w50: J1.2 3600,4807.47 3635,4842.47 3635,4912.89 3460,5087.89 3460,5323.8 3502.78,5366.57 4673.43,5366.57 v1(4675,5365) 6295,5365 6500,5160 6500,5115 v1(6495,5110)
  Bottom Layer w20: U2.1@3377.99,4632.64 3389.88,4644.53 3539.53,4644.53 3590,4695 J1.2
  Bottom Layer w40: C5.1 3384.37,4296.81 3405.14,4296.81 3440,4331.67 3440,4570.63 U2.1@3377.99,4632.64 ; v1(4675,5365) 4675,5145 5175,4645 CN1.27 ; C6.2 6553.15,4423.15 6570,4440 U3.3
  Bottom Layer w50: v1(6495,5110) 6495,4463.15 C6.2
SD_CS: CN1.6 J3.2 R11.2 | length 3251.1
  Bottom Layer w10: J3.2@4763.39,3765.16 J3.2 4763.39,4190.98 R11.2 4589.37,4255 4542.33,4255 4523.07,4274.26 4523.07,4281.93 4510,4295 4510,4470 4565,4525 5210,4525 5230,4545 5230,4655 4785,5100 4785,5235 4850,5300 5275,5300 5375,5200 CN1.6
SPI3_MISO: CN1.15 J1.21 J3.7 R7.2 | length 5166.2
  Top Layer w10: J1.21 3550,3645 3550,3582.03 3587.03,3545 3621.72,3545 3766.72,3400 4695,3400 4980,3685 v1(4980,3930) 5050,4000 5050,4210 4948.76,4311.24 4948.76,4357.04 5087.19,4495.47 5653.44,4495.47 5725,4567.03 5725,5066.72 5768.28,5110 6205,5110 CN1.15
  Bottom Layer w10: J3.7 4979.92,4090.08 4940,4130 4940,4205 5050,4315 5050,4376.93 5078.07,4405 R7.2@5090.63,4405
SPI3_MOSI: CN1.14 J1.19 J3.3 R5.2 | length 4868.2
  Top Layer w10: v1(4745,4420) 4810,4485 4942.97,4485 5030.47,4572.5 5030.47,4607.97 5057.5,4635 5382.97,4635 5419.53,4598.44 5419.53,4560.47 5444.53,4535.47 5593.44,4535.47 5630.47,4572.5 5630.47,5000.47 5765.47,5135.47 6130.47,5135.47 CN1.14
  Bottom Layer w10: J1.19@3495,3795 J1.19 3550,3745 3655,3745 4094.75,4184.75 4628.54,4184.75 4680,4133.28 4680,3760 4699.53,3740.47 4782,3740.47 4806.69,3765.16 J3.3 4806.69,4252.68 R5.2 4740,4415 v1(4745,4420)
SPI3_SCLK: CN1.16 J1.23 J3.5 R8.2 | length 4320.3
  Top Layer w10: v1(5000,4335) 5000,4380 5095.47,4475.47 6080.47,4475.47 6120,4515 6120,4605 6145,4630 6225,4630 CN1.16
  Bottom Layer w10: J1.23 3550,3645 3625,3645 4140,4160 4625,4160 4655.25,4129.75 4655.25,3749.75 4684.53,3720.47 4790.28,3720.47 4810.28,3740.47 4883.64,3740.47 4893.31,3750.14 J3.5 4893.31,4313.94 R8.2 5000,4399.37 v1(5000,4335)
SPI3_SSEL: CN1.22 J1.24 R9.1 | length 3245.6
  Top Layer w10: J1.24 3775,3420 4686.72,3420 4925,3658.28 4925,4015 5000,4090 v1(5000,4200) 4928.76,4271.24 4928.76,4368.76 5075.47,4515.47 5601.73,4515.47 5666.26,4580 CN1.22
  Bottom Layer w10: v1(5000,4200) 5095.63,4295.63 R9.1@5095.63,4305
UART1_RX: CN1.7 J1.10 | length 2790.6
  Top Layer w10: J1.10 3684.53,4379.53 3684.53,4778.86 3740,4834.33 3740,5225 3799.06,5284.06 5370.94,5284.06 CN1.7
UART1_TX: CN1.8 J1.8 | length 2824.2
  Top Layer w10: J1.8 3664.53,4459.53 3664.53,4787.14 3720,4842.62 3720,5233.28 3769.53,5282.81 ; 3769.53,5283.28 3769.53,5282.81 ; CN1.8 5550,5180 5425.94,5304.06 4577.51,5304.06 3790.77,5304.06 3769.53,5282.81
VBAT+: P3.2 U2.5 | length 541.6
  Bottom Layer w100: U2.5@3255.94,4825.55 3255.94,4909.06 3200,4965 3200,5185 3270,5255 P3.2
VBAT-: P3.1 U2.6 | length 250.8
  Bottom Layer w100: P3.1 3374.06,5014.09 U2.6@3374.06,4825.55
VIn: C2.2 CN1.30 U1.3 | length 2063
  Top Layer w50: C2.2 4160,4411.85 4160,4205 4235,4130 4435,4130 ; U1.3@4355,3555 4435,3635 4435,4130 ; CN1.30 4585,4580 4435,4430 4435,4130
  Top Layer w100: U1.3@4255,3555 U1.3@4355,3555
VOLT_SENSE: CN1.24 R3.1 R4.2 | length 3159.8
  Top Layer w10: R3.1@4005,4586.85 R3.1 3940,4565 3873.82,4498.82 3756.18,4498.82 3726.85,4528.15 3726.85,4683.77 4170,5126.92 4170,5232.47 4201.58,5264.06 5355.94,5264.06 5419.53,5200.47 5419.53,4635.47 CN1.24
pads on no net: CN1.3 CN1.9 CN1.10 CN1.11 CN1.12 CN1.18 CN1.19 CN1.20 CN1.21 CN1.25 CN1.26 CN1.28 J1.3 J1.4 J1.5 J1.7 J1.11 J1.12 J1.13 J1.15 J1.16 J1.17 J1.18 J1.20 J1.22 J1.25 J1.26 J1.27 J1.28 J1.29 J1.30 J1.31 J1.32 J1.33 J1.34 J1.35 J1.36 J1.37 J1.38 J1.39 J1.40 J1.H J2.3 J2.7 J2.10 J2.11 J3.1 J3.8 U2.4 U2.7 U3.5 U4.7 U5.H U6.5 U6.6 U6.7 U6.8

## Text inside footprints (layer, text, board x,y; h text height)
CN1: Bottom Overlay "Nucleo-32" at 5945.87,4821.73 h100; Bottom Overlay "RST" at 6489.17,4959.53 h60 r90; Bottom Overlay "USB" at 4693.9,4943.78 h60 r90
D1: Top Overlay "+" at 5939.63,3103.66 h39.37 r270
D2: Top Overlay "+" at 5439.63,3103.66 h39.37 r270
D3: Top Overlay "+" at 4939.63,3103.66 h39.37 r270
D4: Top Overlay "+" at 4439.63,3103.66 h39.37 r270
D5: Top Overlay "+" at 4440,2810.24 h39.37 r90
D6: Top Overlay "+" at 4940,2810.24 h39.37 r90
D7: Top Overlay "+" at 5440,2814.29 h39.37 r90
D8: Top Overlay "+" at 5940,2820.24 h39.37 r90
J1: Top Overlay "39" at 3345,2765 h60; Top Overlay "1" at 3415,4665 h60; Top Overlay "Raspberry Pi 3 B" at 3740,2770 h60 r90
J2: Bottom Overlay "6" at 7229.06,4598.62 h59.06 r270; Bottom Overlay "9" at 7229.06,4925.79 h59.06 r270; Bottom Overlay "5" at 6858.98,4980.32 h59.06 r270; Bottom Overlay "1" at 6858.98,4553.94 h59.06 r270
J3: Bottom Overlay "Micro SD" at 5058.66,3855.87 h60
U1: Bottom Overlay "Buck conv." at 4103.03,4165.24 h60 r90; Bottom Overlay "IN-" at 3902.24,4188.86 h60 r90; Bottom Overlay "OUT-" at 3902.24,3838.46 h60 r90; Bottom Overlay "IN+" at 4335.31,4188.86 h60 r90; Bottom Overlay "OUT+" at 4335.31,3846.34 h60 r90
U2: Bottom Overlay "GND" at 3361.18,4542.09 h39.37; Bottom Overlay "5V" at 3467.48,4612.95 h39.37; Bottom Overlay "Out" at 3220,4670 h39.37 r90; Bottom Overlay "<NC>" at 3380.87,4715.31 h39.37; Bottom Overlay "+" at 3270.63,4872.8 h60; Bottom Overlay "-" at 3388.74,4872.8 h60
U5: Top Overlay "LCD" at 4134.24,1563 h200
U6: Bottom Overlay "o" at 5514.92,3959.84 h60 r90